# Altium PCB micromouse.PcbDoc
Units mil, origin at the board's own origin, x right, y up, seen from the top; angles counter-clockwise.
Board outline 3606.38 x 4150 mil, 2 copper layers (Top Layer, Bottom Layer), stack 12.8 mil thick; 109 components, 83 nets, 392 pads, 106 vias.
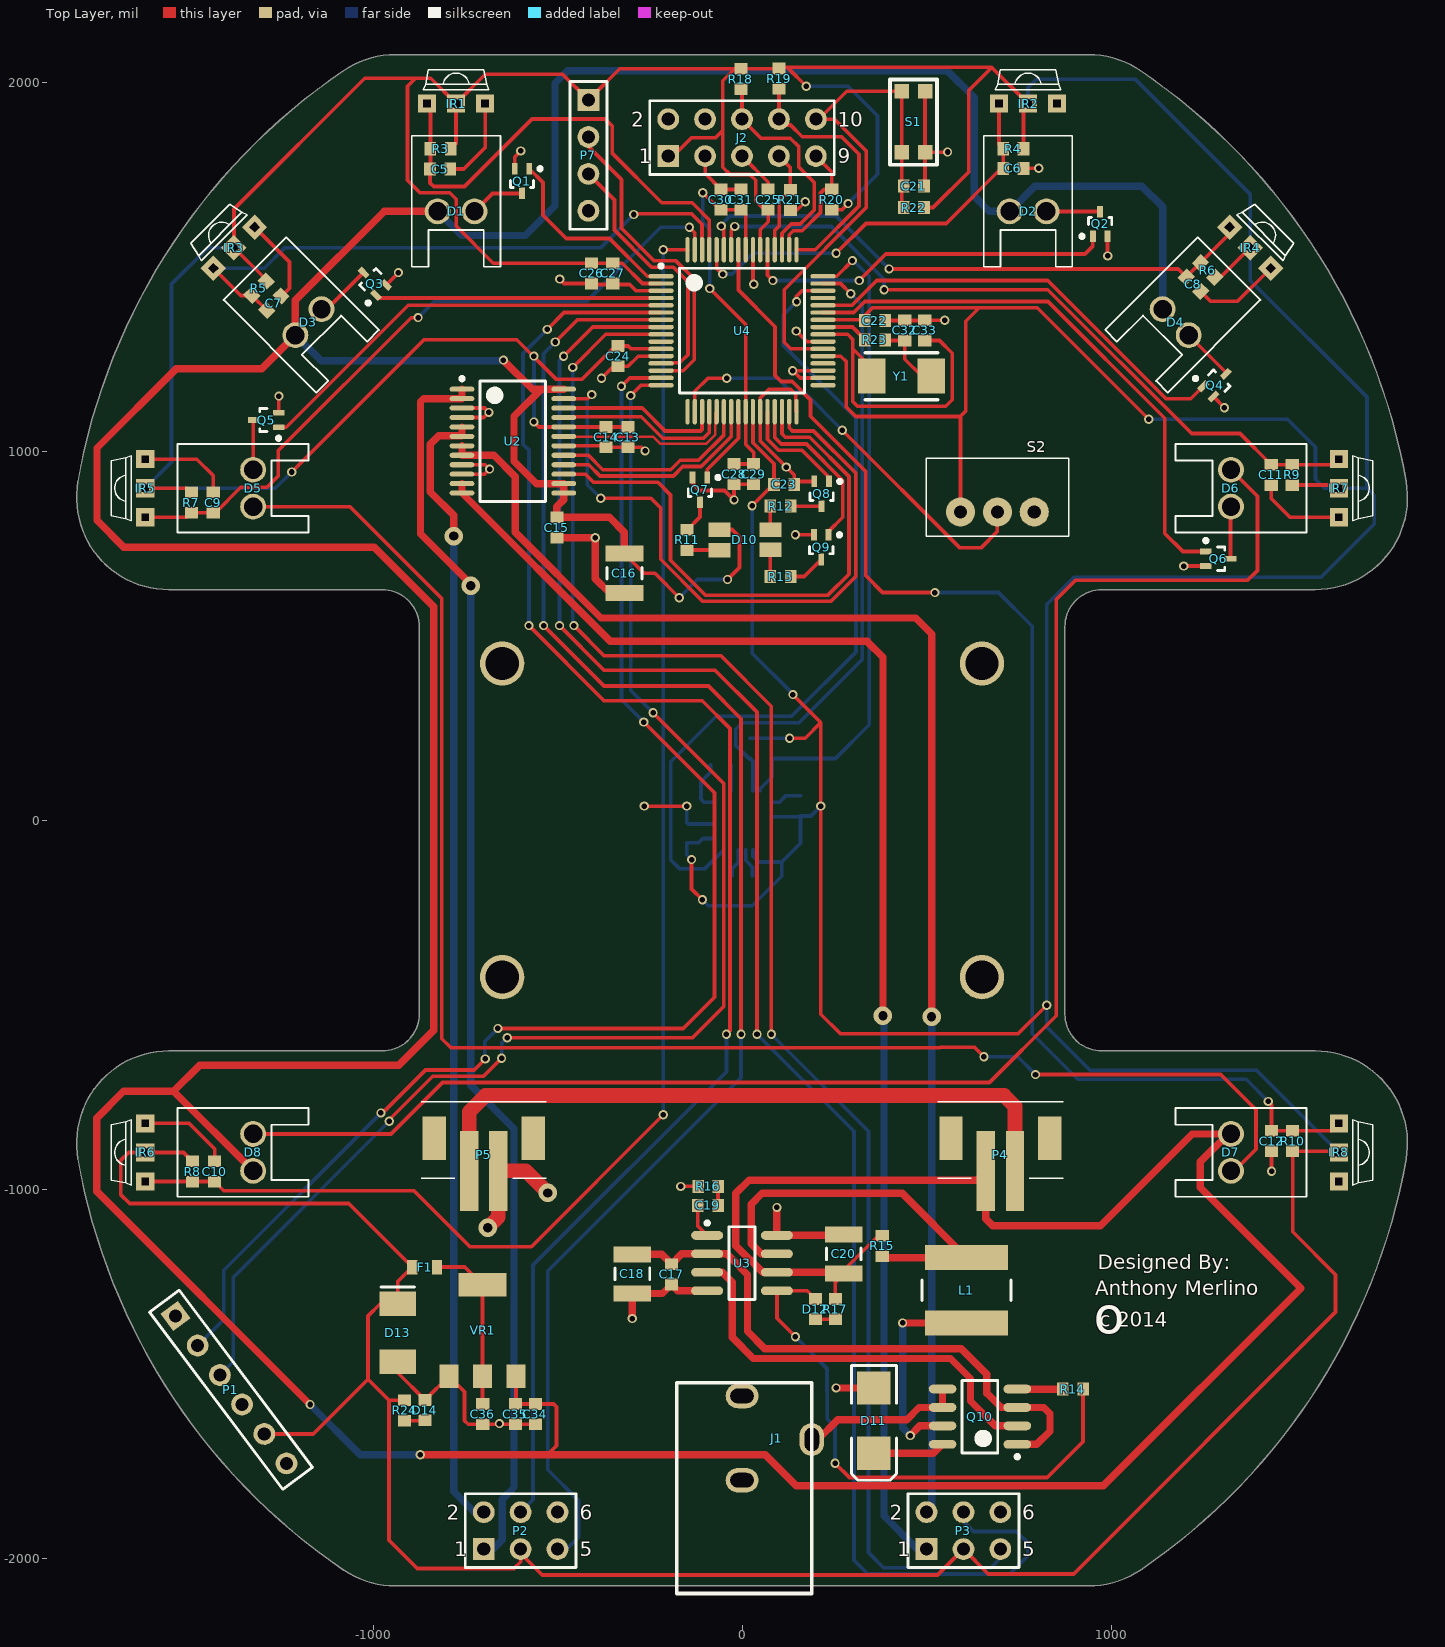
[diagram p0: Top Layer view]
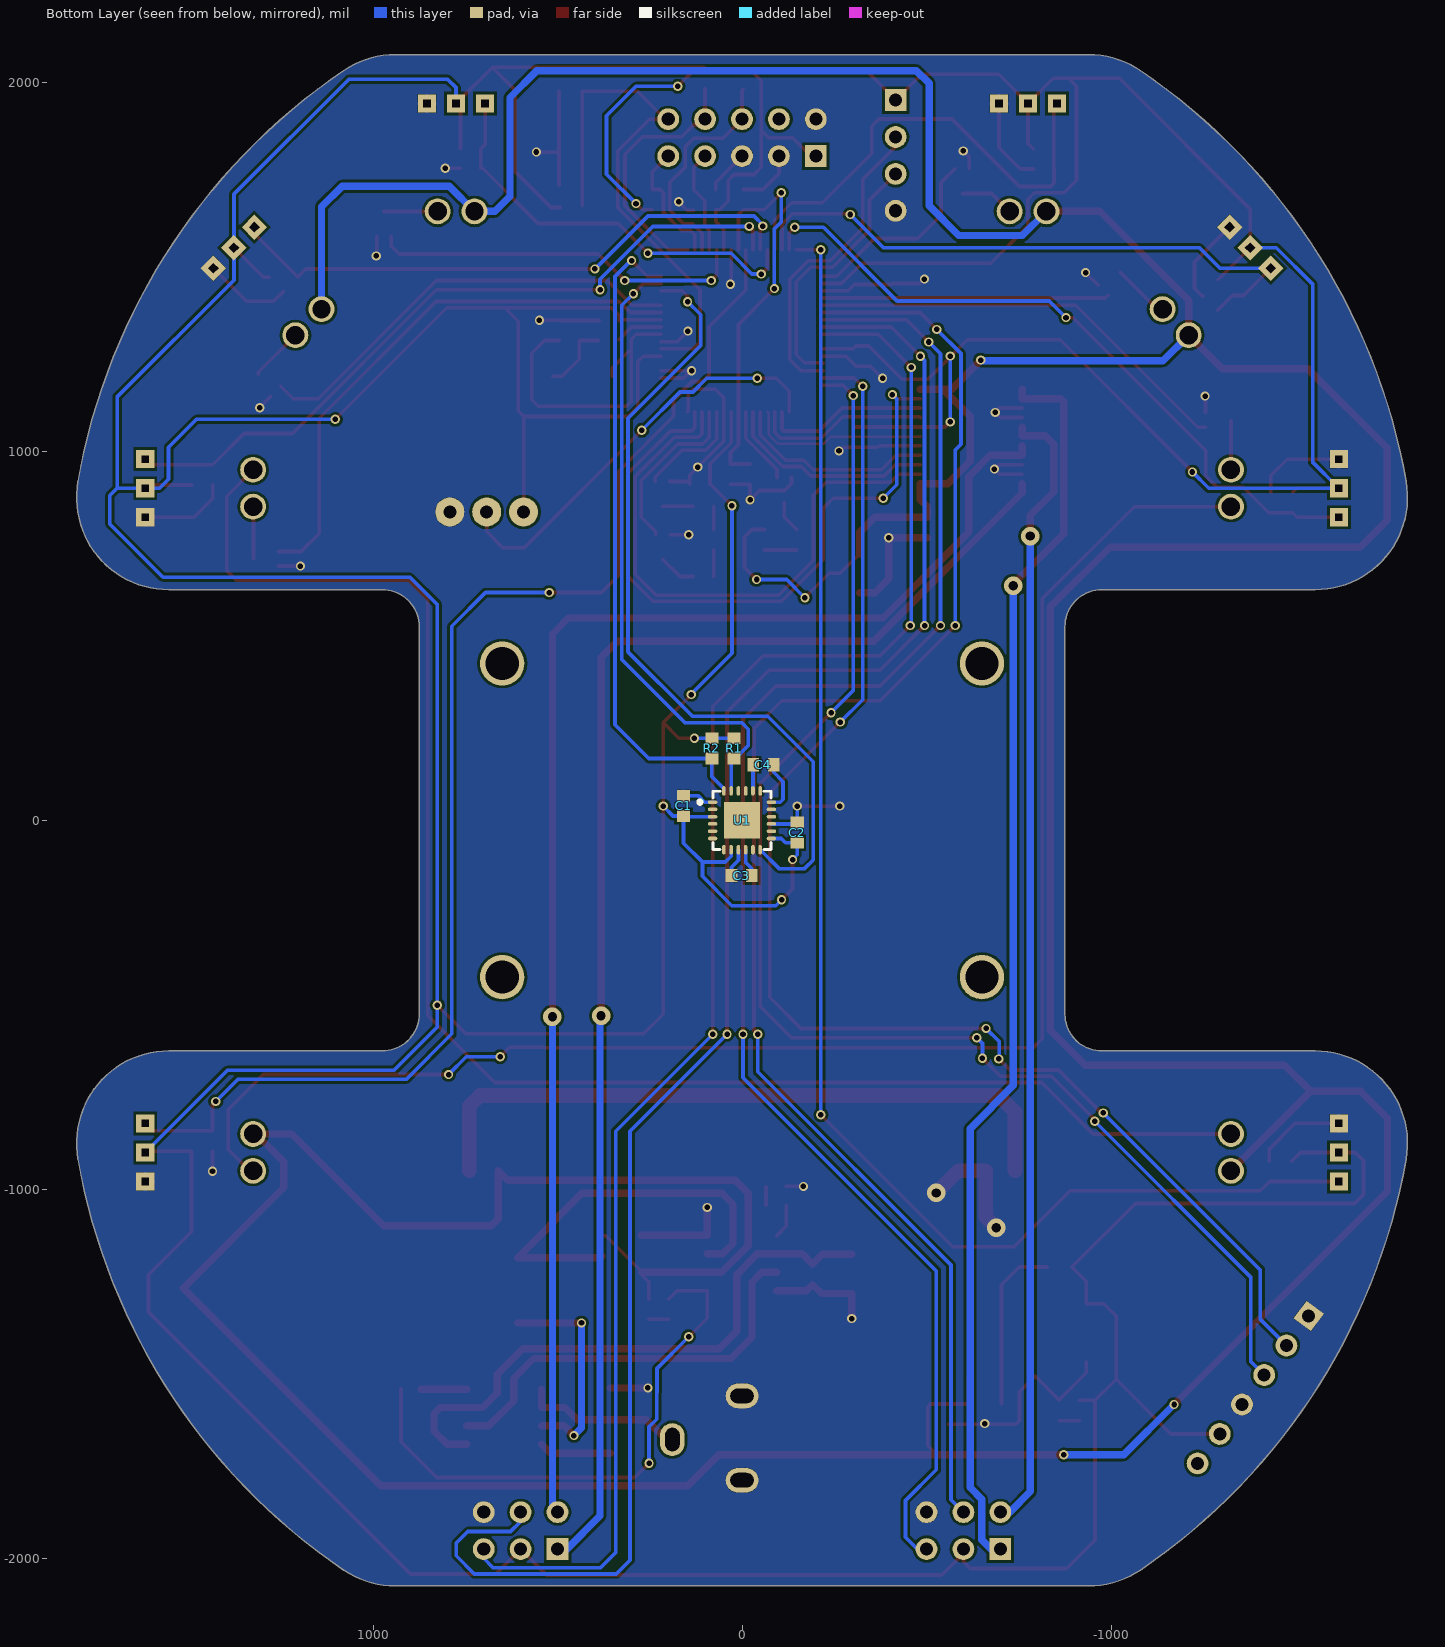
[diagram p1: Bottom Layer view, seen from below]

## Layer stack, top to bottom
Top Solder: solder mask 0.4, Solder Resist, Dk 3.5
Top Layer: signal copper 1.4
Dielectric 1: core 10, FR-4, Dk 4.2
Bottom Layer: signal copper 1.4
Bottom Solder: solder mask 0.4, Solder Resist, Dk 3.5

## Board outline
-1079.28,-2031.91 cw(c-125,-625.01) -1799.55,-918.12 -1799.55,-918.11 cw(c-1553.29,-875.01) -1553.29,-625.01 -975,-625.01 ccw(c-975,-525.01) -875,-525.01 -875,524.99 ccw(c-975,524.99) -975,624.99 -1553.29,624.99 cw(c-1553.29,874.99) -1799.55,918.09 cw(c-125,624.99) -1079.28,2031.89 cw(c-938.95,1824.99) -938.95,2074.99 938.94,2074.99 cw(c938.94,1824.99) 1079.27,2031.89 cw(c125,624.99) 1799.54,918.09 cw(c1553.28,874.99) 1553.28,624.99 975,624.99 ccw(c975,524.99) 875,524.99 875,-525.01 ccw(c975,-525.01) 975,-625.01 1553.28,-625.01 cw(c1553.28,-875.01) 1799.54,-918.11 1799.54,-918.12 cw(c125,-625.01) 1079.27,-2031.91 cw(c938.94,-1825.01) 938.94,-2075.01 -938.95,-2075.01 cw(c-938.95,-1825.01)

## Design rules (kind name [scope] priority, off if disabled: settings)
Clearance [All] p1: gap=7
ComponentClearance [All] p1 off: gap=10 collisioncheckmode=3 verticalgap=10 showdistances=FALSE
MinimumSolderMaskSliver [All] p1 off: minsoldermaskwidth=10
MinimumSolderMaskSliver SilkscreenOverComponentPads [All] p2 off: minsoldermaskwidth=10
PolygonConnect PolygonConnect_1 [isVia] p1: connectstyle=Direct reliefconductorwidth=10 reliefentries=4 polygonreliefangle="90 Angle" airgapwidth=10
RoutingVias [All] p1: holewidth=28 width=50 viastyle="Through Hole" minholewidth=8 minwidth=20 maxholewidth=38 maxwidth=50
SilkToSilkClearance [All] p1 off: silktosilkclearance=10
SilkToSolderMaskClearance [IsPad] p1: minsilkscreentomaskgap=5 clearancetoexposedcopper=TRUE
SolderMaskExpansion [All] p1: expansion=4
Width [All] p1: maxlimit=50 minlimit=7 preferedwidth=8
25 further rules are at their usual default settings.

## Classes and differential pairs
component class Status_LED: D10 Q7 Q8 Q9 R11 R12 R13
component class Power_Regulation: C34 C35 C36 D13 D14 F1 R24 VR1
component class "Motor Control": C13 C14 C15 C16 P2 P3 U2
component class IR_Receivers: C5 C6 C7 C8 C9 C10 C11 C12 IR1 IR2 IR3 IR4 IR5 IR6 IR7 IR8 R3 R4 R5 R6 R7 R8 R9 R10
component class IR_Emitters: D1 D2 D3 D4 D5 D6 D6] D7 D8 Q1 Q2 Q3 Q4 Q5 Q6
component class Gyroscope-Acceleromter: C1 C2 C3 C4 R1 R2 U1
component class controller_power: C21 C22 C23 C24 C25 C26 C27 C28 C29 C30 C31 C32 C33 R22 R23 S1 Y1
component class controller_peripherals: J2 P7 R18 R19 R20 R21 S2 U4
component class Bluetooth: P1
component class battery_charger: C17 C18 C19 C20 D11 D12 J1 L1 P4 P5 Q10 R14 R15 R16 R17 U3

## Components (designator, comment, footprint, x,y, rotation, side; value= is the part's Value field where it differs from the comment)
C1 "Cap Semi" 1608[0603] 158.46,39.37 r270 bottom
C2 "Cap Semi" 1608[0603] -149.61,-33.46 r270 bottom
C3 "Cap Semi" 1608[0603] 0.98,-149.61 r180 bottom
C4 "Cap Semi" 1608[0603] -58.07,150.59 r0 bottom
C5 "Cap Semi" 1608[0603] -817.91,1764.76 r180 top
C6 "Cap Semi" 1608[0603] 735.24,1766.73 r180 top
C7 "Cap Semi" 1608[0603] -1268.7,1401.57 r225 top
C8 "Cap Semi" 1608[0603] 1223.43,1452.76 r135 top
C9 "Cap Semi" 1608[0603] -1433.07,861.22 r270 top
C10 "Cap Semi" 1608[0603] -1429.13,-951.77 r270 top
C11 "Cap Semi" 1608[0603] 1434.06,936.02 r90 top
C12 "Cap Semi" 1608[0603] 1435.04,-869.09 r90 top
C13 "Cap Semi" 1608[0603] -309.06,1038.39 r90 top
C14 "Cap Semi" 1608[0603] -368.11,1038.39 r90 top
C15 "Cap Semi" 1608[0603] -501.97,793.31 r90 top
C16 "Cap Semi" C1210 -318.9,669.29 r90 top
C17 "Cap Semi" 1608[0603] -190.94,-1230.32 r90 top
C18 "Cap Semi" C1210 -297.24,-1229.33 r90 top
C19 "Cap Semi" 1608[0603] -92.52,-1043.31 r180 top
C20 "Cap Semi" C1210 275.59,-1175.2 r270 top
C21 "Cap Semi" 1608[0603] 465.55,1718.5 r180 top
C22 "Cap Semi" 1608[0603] 360.24,1354.33 r180 top
C23 "Cap Semi" 1608[0603] 114.17,910.43 r180 top
C24 "Cap Semi" 1608[0603] -335.63,1257.87 r90 top
C25 "Cap Semi" 1608[0603] 70.87,1682.09 r270 top
C26 "Cap Semi" 1608[0603] -407.48,1482.28 r90 top
C27 "Cap Semi" 1608[0603] -350.39,1482.28 r90 top
C28 "Cap Semi" 1608[0603] -21.65,937.99 r90 top
C29 "Cap Semi" 1608[0603] 31.5,937.99 r90 top
C30 "Cap Semi" 1608[0603] -57.09,1682.09 r270 top
C31 "Cap Semi" 1608[0603] -2.95,1682.09 r270 top
C32 "Cap Semi" 1608[0603] 440.94,1327.76 r270 top
C33 "Cap Semi" 1608[0603] 495.08,1327.76 r270 top
C34 "Cap Semi" 1608[0603] -560.04,-1609.25 r90 top
C35 "Cap Semi" 1608[0603] -614.17,-1609.25 r90 top
C36 "Cap Semi" 1608[0603] -702.76,-1609.25 r90 top
D1 "LED" LED-BENT -775,1650 r180 top
D2 "LED" LED-BENT 775,1650 r180 top
D3 "LED" LED-BENT -1175,1350 r225 top
D4 "LED" LED-BENT 1175,1350 r135 top
D5 "LED" LED-BENT -1325,900 r270 top
D6 "LED" LED-BENT 1325,900 r90 top
D7 "LED" LED-BENT 1325,-900 r90 top
D8 "LED" LED-BENT -1325,-900 r270 top
D10 "LED_RGB_CC" SM1210RGB 7.87,760.43 r90 top
D11 "D Schottky" SMB 357.28,-1626.97 r270 top
D12 "LED" 0603 198.82,-1324.8 r90 top
D13 "3.9V" DO-214AC -933.07,-1388.78 r270 top
D14 "LED" 0603 -859.25,-1598.43 r90 top
F1 "500mA" "0603 PTC Fuse" -860.24,-1210.63 r180 top
IR1 "TSL262R" TSL262R -775,1975 r180 top
IR2 "TSL262R" TSL262R 775,1975 r180 top
IR3 "TSL262R" TSL262R -1400,1575 r225 top
IR4 "TSL262R" TSL262R 1400,1575 r135 top
IR5 "TSL262R" TSL262R -1650,900 r270 top
IR6 "TSL262R" TSL262R -1650,-900 r270 top
IR7 "TSL262R" TSL262R 1650,900 r90 top
IR8 "TSL262R" TSL262R 1650,-900 r90 top
J1 "DC Barrel Jack" "DC BARREL JACK" 0,-1560 r90 top
J2 "JTAG" HDR2X5 -200,1800 r0 top
L1 "Inductor" INDC6060X49N 608.27,-1273.62 r90 top
P1 "BLUETOOTH MODULE" HDR1X6 -1535.43,-1343.5 r307 top
P2 "LEFT MOTOR" HDR2X3 -700,-1975 r0 top
P3 "RIGHT MOTOR" HDR2X3 500,-1975 r0 top
P4 "JST 2-Pin" "JST CONNECTOR 2-PIN" 700,-950 r0 top
P5 "JST 2-Pin" "JST CONNECTOR 2-PIN" -700,-950 r0 top
P7 "UART_DEBUG" HDR1X4 -416.34,1951.77 r270 top
Q1 "Pre-Biased NPN" SOT-416 -596.46,1732.28 r270 top
Q2 "Pre-Biased NPN" SOT-416 970.47,1616.14 r90 top
Q3 "Pre-Biased NPN" SOT-416 -1001.97,1460.63 r135 top
Q4 "Pre-Biased NPN" SOT-416 1287.4,1186.02 r45 top
Q5 "Pre-Biased NPN" SOT-416 -1289.37,1084.65 r180 top
Q6 "Pre-Biased NPN" SOT-416 1290.35,708.66 r0 top
Q7 "Pre-Biased NPN" SOT-416 -114.17,895.67 r270 top
Q8 "Pre-Biased NPN" SOT-416 215.55,884.84 r270 top
Q9 "Pre-Biased NPN" SOT-416 214.57,740.16 r270 top
Q10 "Dual P-Channel" SOIC-8 644.69,-1616.14 r180 top
R1 "Resistor" 0603 21.65,194.88 r90 bottom
R2 "Resistor" 0603 81.69,194.88 r90 bottom
R3 "Resistor" 0603 -816.93,1819.88 r180 top
R4 "Resistor" 0603 735.24,1819.88 r180 top
R5 "Resistor" 0603 -1309.06,1441.93 r225 top
R6 "Resistor" 0603 1261.81,1491.14 r135 top
R7 "Resistor" 0603 -1492.13,861.22 r270 top
R8 "Resistor" 0603 -1489.17,-951.77 r270 top
R9 "Resistor" 0603 1491.14,936.02 r90 top
R10 "Resistor" 0603 1492.13,-869.09 r90 top
R11 "Resistor" 0603 -148.62,759.84 r270 top
R12 "Resistor" 0603 104.33,851.38 r180 top
R13 "Resistor" 0603 104.33,660.43 r180 top
R14 "Resistor" 0603 896.65,-1541.34 r180 top
R15 "Resistor" 0603 379.92,-1153.54 r270 top
R16 "Resistor" 0603 -91.54,-992.13 r0 top
R17 "Resistor" 0603 252.95,-1324.8 r270 top
R18 "Resistor" 0603 -2.95,2008.86 r90 top
R19 "Resistor" 0603 100.39,2009.84 r90 top
R20 "Resistor" 0603 243.11,1682.09 r270 top
R21 "Resistor" 0603 130.91,1681.1 r90 top
R22 "Resistor" 0603 465.55,1660.43 r0 top
R23 "Resistor" 0603 360.24,1302.17 r180 top
R24 "Resistor" 0603 -914.37,-1599.41 r90 top
S1 "KMR4" KMR4 464.57,1892.72 r270 top
S2 "SW-SPDT" "SPDT Switch" 691.93,875 r270 top
U1 "MPU-9150" MPU-9150 0,0 r180 bottom
U2 "TB6612FNG" SSOP24-P-300-0.65A -621.06,1027.56 r0 top
U3 "LTC4002ES8-8.4" LT-S8-8_N 0,-1200 r0 top
U4 "TM4C123GH6PM" TSQFP50P1200X1200X145-64N 0,1326.77 r0 top
VR1 "AP1117" SOT-223 -703.17,-1416.07 r0 top
Y1 "XTAL" ABM3_SERIES 432.09,1203.74 r180 top

## Footprints (in the part's own frame and the unit in brackets; to place one, negate y for a bottom-side part, rotate by r counter-clockwise, add the part's x,y. Pads: shape width x height; smd on the part's side, far side on the other; paste and mask are expansions set on the pad)
0603 [mm] "Chip Capacitor; Body 1.6 x 0.8 mm (LxW typ)"
  rect 0.8x0.9 smd: 1(-0.7,0) 2(0.7,0)
  body extent -0.87,-0.48 0.87,0.48, height 1.3
"0603 PTC Fuse" [mm] "0603 1mm x 0.7mm Pads with 1mm Spacing"
  rect 0.7x1 smd: 1(-0.85,0) 2(0.85,0)
1608[0603] [mm] "Chip Capacitor, Body 1.6x0.8mm, IPC High Density"
  rect 0.8x0.9 smd: 1(-0.7,0) 2(0.7,0)
  body extent -0.87,-0.48 0.87,0.48, height 1.3
ABM3_SERIES [mm] "2-SMD"
  rect 1.9x2.4 smd: 1(-2.05,0) 2(2.05,0)
  silkscreen extent -2.5,-1.6 2.5,1.63
C1210 [mm] "Chip Capacitor, Body 3.2x2.5mm, IPC High Density"
  rect 1.1x2.6 smd: 1(-1.35,0) 2(1.35,0)
  silkscreen extent -0.4,-1.2 0.4,1.2, body extent -1.7,-1.35 1.7,1.35, height 1.3
"DC BARREL JACK" [mm] "Sparkfun: PRT-10811"
  oval 1.7x2.25 hole 1 slot 1.6 at 90 deg: 1(0,0) 2(-5.8,0)
  oval 2.25x1.7 hole 1 slot 1.6 at 0 deg: 3(-3,-4.8)
  silkscreen extent -13.6,-4.8 0.9,4.5
DO-214AC [mm] "Molded Diode, 2-Leads, Body 4.3x2.6mm, IPC Medium Density"
  rect 1.7x2.5 smd: 1(-2,0) 2(2,0)
  silkscreen extent -3.15,-1.15 -3.15,1.15, body extent -2.6,-1.27 2.6,1.33, height 2.4
HDR1X4 [mm] "Connector; Header; 4 Position"
  rect 1.5x1.5 hole 0.9: 1(0,0)
  round 1.5 hole 0.9: 2(2.54,0) 3(5.08,0) 4(7.62,0)
  silkscreen extent -1.27,-1.27 8.89,1.27
HDR1X6 [mm] "Connector; Header; 6 Position"
  rect 1.5x1.5 hole 0.9: 1(0,0)
  round 1.5 hole 0.9: 2(2.54,0) 3(5.08,0) 4(7.62,0) 5(10.16,0) 6(12.7,0)
  silkscreen extent -1.27,-1.27 13.97,1.27
HDR2X3 [mm] "Connector; Header; 3x2 Position"
  rect 1.5x1.5 hole 0.9: 1(0,0)
  round 1.5 hole 0.9: 2(0,2.54) 3(2.54,0) 4(2.54,2.54) 5(5.08,0) 6(5.08,2.54)
  silkscreen extent -1.27,-1.27 6.35,3.81
HDR2X5 [mm] "Connector; Header; 5x2 Position"
  rect 1.5x1.5 hole 0.9: 1(0,0)
  round 1.5 hole 0.9: 2(0,2.54) 3(2.54,0) 4(2.54,2.54) 5(5.08,0) 6(5.08,2.54) 7(7.62,0) 8(7.62,2.54) 9(10.16,0) 10(10.16,2.54)
  silkscreen extent -1.27,-1.27 11.43,3.81
INDC6060X49N [mm] "Chip Inductor, 2-Leads, Body 6.00x6.00mm, IPC Medium Density"
  rect 1.7x5.7 smd: 1(-2.25,0) 2(2.25,0)
  silkscreen extent -0.7,-3.05 0.7,3.05, body extent -3.15,-3.15 3.15,3.15, height 4.9
"JST CONNECTOR 2-PIN" [mm] "2-Pin JST connector for battery"
  rect 1.25x5.5 smd: 1(-1,0) 2(1,0)
  rect 1.6x3 smd: N(-3.4,2.25) N(3.4,2.25)
  silkscreen extent -4.32,-0.51 4.32,4.75
KMR4 [mm]
  rect 1x1 smd: 1(2.1,0.8) 2(2.1,-0.8) 3(-2.1,0.8) 4(-2.1,-0.8)
  silkscreen extent -2.91,-1.61 2.94,1.63
LED-BENT [mil] "LED; 2 Leads"
  round 70 hole 50: 1(50,0) 2(-50,0)
  silkscreen extent -120,-205 120,150
LT-S8-8_N [mm] "SOIC, 8-Leads, Body 5x4mm, Pitch 1.27mm, IPC Medium Density"
  oval 2.2x0.6 smd: 1(-2.4,1.905) 2(-2.4,0.635) 3(-2.4,-0.635) 4(-2.4,-1.905) 5(2.4,-1.905) 6(2.4,-0.635) 7(2.4,0.635) 8(2.4,1.905)
  silkscreen extent -2.52,-2.5 0.9,2.88, body extent -2,-2.5 2,2.5, height 1.76
MPU-9150 [mm] "QFN, 24-Leads, Body 4.0x4.0mm (max), Pitch 0.50mm, IPC Medium Density"
  oval 0.65x0.25 smd: 1(-2.025,1.25) 2(-2.025,0.75) 3(-2.025,0.25) 4(-2.025,-0.25) 5(-2.025,-0.75) 6(-2.025,-1.25) 13(2.025,-1.25) 14(2.025,-0.75) 15(2.025,-0.25) 16(2.025,0.25) 17(2.025,0.75) 18(2.025,1.25)
  oval 0.25x0.65 smd: 7(-1.25,-2.025) 8(-0.75,-2.025) 9(-0.25,-2.025) 10(0.25,-2.025) 11(0.75,-2.025) 12(1.25,-2.025) 19(1.25,2.025) 20(0.75,2.025) 21(0.25,2.025) 22(-0.25,2.025) 23(-0.75,2.025) 24(-1.25,2.025)
  rect 2.5x2.5 smd: 25(0,0)
  silkscreen extent -3.03,-2 2,2, body extent -2,-2 2,2, height 0.95
SM1210RGB [mm] "BIVAR RGB LED, 1210"
  rect 1x1.5 smd: 1(0.7,1.75) 2(-0.711,1.753) 3(0.7,-1.75) 4(-0.7,-1.75)
SMB [mm] "DO-214-AA/SMB; 2 C-Bend Leads; Body 5.3 x 3.6 mm, inc. leads (LxW)"
  rect 2.3x2.3 smd: 1(-2.25,0) 2(2.25,0)
  silkscreen extent -3.8,-1.55 4.1,1.55
SOIC-8 [mm] "SOIC, 8-Leads, Body 4.90x3.90mm, Pitch 1.27mm, IPC Medium Density"
  oval 1.9x0.6 smd: 1(-2.575,1.905) 2(-2.575,0.635) 3(-2.575,-0.635) 4(-2.575,-1.905) 5(2.575,-1.905) 6(2.575,-0.635) 7(2.575,0.635) 8(2.575,1.905)
  silkscreen extent -2.7,-2.5 1.22,2.88, body extent -2,-2.5 2,2.5, height 1.75
SOT-223 [mm]
  rect 1.3x1.6 smd: 1(-2.3,-2.3) 2(0,-2.3) 3(2.3,-2.3)
  rect 3.3x1.6 smd: 4(0,4)
SOT-416 [mm] "SOT23, 3-Leads, Body 1.6x1.7mm (max), Pitch 0.50mm, IPC Medium Density"
  rect 0.8x0.4 smd: 1(-0.85,0.5) 2(-0.85,-0.5) 3(0.85,0)
  silkscreen extent -0.97,-0.8 0.45,1.38, body extent -0.45,-0.83 0.45,0.82, height 0.9
"SPDT Switch" [mm]
  round 2 hole 0.9: 1(1,2.54) 2(1,0) 3(1,-2.54)
  silkscreen extent -2.69,-4.9 2.69,4.9, body extent -2.69,-4.9 2.69,4.9, height 11.6
SSOP24-P-300-0.65A [mm] "TSOP, 24-Leads, Body 8.3x5.6mm (max), Pitch 0.65mm, IPC Medium Density"
  oval 1.7x0.35 smd: 1(-3.5,3.575) 2(-3.5,2.925) 3(-3.5,2.275) 4(-3.5,1.625) 5(-3.5,0.975) 6(-3.5,0.325) 7(-3.5,-0.325) 8(-3.5,-0.975) 9(-3.5,-1.625) 10(-3.5,-2.275) 11(-3.5,-2.925) 12(-3.5,-3.575) 13(3.5,-3.575) 14(3.5,-2.925) 15(3.5,-2.275) 16(3.5,-1.625) 17(3.5,-0.975) 18(3.5,-0.325) 19(3.5,0.325) 20(3.5,0.975) 21(3.5,1.625) 22(3.5,2.275) 23(3.5,2.925) 24(3.5,3.575)
  silkscreen extent -3.62,-4.15 2.25,4.42, body extent -2.8,-4.15 2.8,4.15, height 1.6
TSL262R [mm] "IR Receiver"
  rect 1.25x1.25 hole 0.5 square: 0(-2,0.83) 1(0,0.83) 2(2,0.83)
  silkscreen extent -2.25,-1.5 2.25,-0.13
TSQFP50P1200X1200X145-64N [mm] "TSQFP, 64-Leads, Body 10.00x10.00mm, Pitch 0.50mm, IPC Medium Density"
  oval 1.75x0.3 smd: 1(-5.575,3.75) 2(-5.575,3.25) 3(-5.575,2.75) 4(-5.575,2.25) 5(-5.575,1.75) 6(-5.575,1.25) 7(-5.575,0.75) 8(-5.575,0.25) 9(-5.575,-0.25) 10(-5.575,-0.75) 11(-5.575,-1.25) 12(-5.575,-1.75) 13(-5.575,-2.25) 14(-5.575,-2.75) 15(-5.575,-3.25) 16(-5.575,-3.75) 33(5.575,-3.75) 34(5.575,-3.25) 35(5.575,-2.75) 36(5.575,-2.25) 37(5.575,-1.75) 38(5.575,-1.25) 39(5.575,-0.75) 40(5.575,-0.25) 41(5.575,0.25) 42(5.575,0.75) 43(5.575,1.25) 44(5.575,1.75) 45(5.575,2.25) 46(5.575,2.75) 47(5.575,3.25) 48(5.575,3.75)
  oval 0.3x1.75 smd: 17(-3.75,-5.575) 18(-3.25,-5.575) 19(-2.75,-5.575) 20(-2.25,-5.575) 21(-1.75,-5.575) 22(-1.25,-5.575) 23(-0.75,-5.575) 24(-0.25,-5.575) 25(0.25,-5.575) 26(0.75,-5.575) 27(1.25,-5.575) 28(1.75,-5.575) 29(2.25,-5.575) 30(2.75,-5.575) 31(3.25,-5.575) 32(3.75,-5.575) 49(3.75,5.575) 50(3.25,5.575) 51(2.75,5.575) 52(2.25,5.575) 53(1.75,5.575) 54(1.25,5.575) 55(0.75,5.575) 56(0.25,5.575) 57(-0.25,5.575) 58(-0.75,5.575) 59(-1.25,5.575) 60(-1.75,5.575) 61(-2.25,5.575) 62(-2.75,5.575) 63(-3.25,5.575) 64(-3.75,5.575)
  silkscreen extent -5.7,-4.3 4.3,4.57, body extent -5,-5 5,5, height 1.45

## Part data
C1 C2 C3 C4 C5 C6 C7 C8 C9 C10 C11 C12 C13 C14 C15 C16 C17 C18 C19 C20 C21 C22 C23 C24 C25 C26 C27 C28 C29 C30 C31 C32 C33 C34 C35 C36: "Capacitor (Semiconductor SIM Model)"
D10: "RGB LED Common Cathode"
D11: "Schottky Diode"
D13: library part "Zener Diode", "3.9V 1.25W"
F1: library part Fuse, "Fuse"
J1: "DC Barrel Jack, Fits 5mm DC Wall Adapter"
J2: library part "10-Pin JTAG ARM", "10-Pin JTAG Connector for Cortex M4 etc."
P1: library part "Header 6", "Header, 6-Pin"
P2 P3: library part "Header 3X2", "Header, 3-Pin, Dual row"
P4 P5: library part "JST Connector 2-Pin", "Header, 2-Pin"
P7: library part "Header 4", "Header, 4-Pin"
Q10: library part Si9933ADY, "Dual P-Channel 20-V (D-S) MOSFET"
S1: library part "SPST Tactile Switch", "Switch"
S2: "SPDT Subminiature Toggle Switch, Right Angle Mounting, Vertical Actuation"
U3: "Standalone Li-Ion Switch Mode Battery Charger, 8.9 to 22 V Vin, 8-pin SOIC (S8-8), -40 to 85 degC"
U4: "Tiva C TM4C123GH6PM"
Y1: "Crystal Oscillator"

## Free pads (board coordinates)
  round 120 hole 90: ""(-650,-425) ""(-650,425) ""(650,-425) ""(650,425)

## Via types
v1: diameter 25, hole 15, Top Layer to Bottom Layer, 100 vias
v2: diameter 50, hole 25, Top Layer to Bottom Layer, 6 vias

## Nets (pads, with @x,y where several pads share a name; then routed paths per layer and width w, separated by ;. In a path a pad name is that pad's centre, name@x,y a point inside that pad or via, vN(x,y) a via of type N, cw(c..) or ccw(c..) an arc to the next point about the centre after c; other vN are vias at no path point)
3.3V: C1.2 C2.2 C13.2 C14.2 C22.2 C23.2 C24.2 C25.2 C26.2 C27.2 D13.1 F1.2 IR1.1 IR2.1 IR3.1 IR4.1 IR5.1 IR6.1 IR7.1 IR8.1 J2.1 P1.5 P2.3 P3.3 P7.1 R1.2 R2.2 R3.1 R4.1 R5.1 R6.1 R7.1 R8.1 R9.1 R10.1 R18.2 R19.2 R20.2 R22.2 R24.2 S2.3 U1.3 U1.8 U1.13 U2.20 U4.2 U4.11 U4.26 U4.37 U4.42 U4.54 | length 26493.6
  Top Layer w10: IR5.1 -1503.35,900 R7.1 ; R8.1 -1513.38,-900 IR6.1 -1661.81,-900 -1684.06,-922.24 -1684.06,-1013.78 -1659.45,-1038.39 -1065.95,-1038.39 F1.2 -933.07,-1250 D13.1 -980.31,-1310.04 -1013.78,-1343.5 -1013.78,-1514.76 ; P1.5 -1161.97,-1662.96 -1013.78,-1514.76 ; R5.1@-1289.57,1464.57 IR3.1 -1376.89,1656.57 -1022.64,2010.83 -884.84,2010.83 ; v1(-1220.47,943.9) -862.2,1302.17 -610.24,1302.17 -502.95,1194.88 -434.06,1194.88 -343.5,1285.43 C24.2 -309.05,1285.43 -301.18,1277.56 U4.11 ; R24.2 -956.69,-1571.85 ; R3.1 -775,1834.25 IR1.1 ; P2.3@-600,-2000 -600,-2009.45 -618.11,-2027.56 -879.92,-2027.56 -956.69,-1950.79 -956.69,-1571.85 ; P2.3 -600,-1986.61 -541.34,-2045.28 529.72,-2045.28 P3.3 667.32,-2042.32 898.62,-2042.32 1608.27,-1332.68 1608.27,-1231.3 1492.13,-1115.16 R10.1 1613.98,-896.65 IR8.1 ; v1(-563.98,1079.72) -550.2,1065.95 U2.20 C14.2 C13.2 ; U4.2 -269.69,1454.73 -324.8,1509.84 C27.2 C26.2 -674.21,1509.84 -774.61,1610.24 -774.61,1683.07 -792.06,1700.52 -872.76,1700.52 -906.5,1734.25 -906.5,1989.17 -884.84,2010.83 ; J2.1 -186.22,1800 -136.81,1849.41 -71.85,1849.41 -52.17,1869.09 ; v1(-136.81,-106.3) -136.81,-186.02 v1(-107.28,-215.55) ; v1(27.32,852.12) 27.32,852.36 85.39,910.43 C23.2 86.61,965.97 29.53,1023.06 U4.26 ; U4.54 49.21,1600.39 70.87,1622.05 C25.2 61.02,1654.53 37.4,1678.15 37.4,1734.25 21.65,1750 -32.48,1750 -52.17,1769.69 -52.17,1869.09 ; R19.2@99.41,2036.42 R18.2 R18.2@-19.68,2036.42 ; R19.2 103.35,2040.35 676.97,2040.35 ; 125.98,2037.4 v1(174.21,1989.17) ; v1(128.94,222.44) 171.26,222.44 213.58,264.76 ; v1(137.8,340.55) 213.58,264.76 ; U4.37 267.72,1257.87 282.48,1243.11 282.48,1120.08 308.07,1094.49 591.54,1094.49 606.3,1109.25 606.3,1352.36 638.78,1384.84 ; U4.42 C22.2@330.71,1356.3 ; R20.2 270.67,1654.53 v1(287.4,1671.26) ; C22.2 332.68,1367.84 353.61,1388.78 800.2,1388.78 v1(1102.36,1086.61) ; R22.2 517.72,1660.43 614.17,1756.89 614.17,1977.56 676.97,2040.35 ; S2.3 591.93,1094.09 ; R4.1 762.8,1930.12 IR2.1 676.97,2040.35 ; v1(825.79,-500.98) 748.03,-578.74 266.73,-578.74 213.58,-525.59 v1(213.58,38.39) 213.58,264.76 ; R6.1 1296.66,1471.66 IR4.1 ; R9.1 1608.86,908.47 IR7.1 ; -1013.78,-1514.76 -956.69,-1571.85 ; -884.84,2010.83 -843.5,2010.83 IR1.1 ; IR1.1 -695.67,2021.65 -486.22,2021.65 P7.1 -331.69,2036.42 R18.2@-19.68,2036.42 ; -52.17,1869.09 -52.17,2003.94 R18.2@-19.68,2036.42
  Bottom Layer w10: IR3.1 -1447.56,1551.89 -1546.26,1453.2 -1546.26,971.06 IR5.1 -1616.93,899.61 -1264.76,899.61 v1(-1220.47,943.9) ; v1(-563.98,1079.72) v1(-563.98,1257.87) ; v1(-136.81,-106.3) -149.61,-93.5 C2.2 -118.11,-61.02 -106.3,-49.21 U1.13 ; v1(-107.28,-215.55) -91.54,-231.3 27.56,-231.3 107.28,-151.57 107.28,-113.19 ; R1.2 R2.2 v1(128.94,222.44) ; v1(27.32,852.12) 27.32,452.99 137.8,342.52 v1(137.8,340.55) ; U1.8 29.53,-97.44 45.28,-113.19 107.28,-113.19 ; U1.3 C1.2@156.5,9.84 ; v1(174.21,1989.17) 287.4,1989.17 367.13,1909.45 367.13,1750.98 v1(287.4,1671.26) ; v1(213.58,38.39) 187.01,11.81 C1.2 158.46,-62.01 107.28,-113.19 ; IR2.1 775,1985.63 797.24,2007.87 1065.94,2007.87 1376.89,1696.93 IR4.1 1376.89,1463.66 1693.5,1147.05 1693.5,900 ; v1(1102.36,1086.61) 1478.35,1086.61 1554.13,1010.83 1554.13,924.21 1578.35,900 IR7.1 1693.5,900 ; IR8.1 1394.49,-677.17 942.91,-677.17 825.79,-560.04 v1(825.79,-500.98) 825.79,584.65 899.61,658.46 1568.9,658.46 1713.58,803.15 1713.58,879.92 1693.5,900
BLUETOOTH_CTS: P1.6
BLUETOOTH_RX: P1.2 U4.15 | length 3774.3
  Top Layer w10: v1(-978.59,-793.07) -978.35,-793.31 -974.41,-793.31 -857.73,-676.63 -725.84,-676.63 v1(-695.87,-646.65) ; v1(-661.42,-563.98) -159.45,-563.98 -74.8,-479.33 -74.8,74.52 v1(-266.38,266.1) ; v1(-326.91,1176.32) -304.41,1198.82 U4.15
  Bottom Layer w10: P1.2 -1404.69,-1352.8 -1404.69,-1219.17 v1(-978.59,-793.07) ; v1@-697.11,-645.41 -697.11,-599.67 v1(-661.42,-563.98) ; v1(-326.91,1176.32) -326.91,326.63 v1(-266.38,266.1)
BLUETOOTH_TX: P1.3 U4.16 | length 3793.2
  Top Layer w10: v1(-955.96,-815.69) -956.2,-815.45 -956.2,-811.52 -838.31,-693.63 -700.52,-693.63 v1(-651.57,-644.68) ; v1(-636.18,-589.22) -134.21,-589.22 -49.48,-504.49 -49.48,99.68 v1(-241.14,291.34) ; v1(-301.67,1151.08) -273.62,1179.13 U4.16
  Bottom Layer w10: P1.3 -1378.94,-1467.1 -1378.94,-1238.67 v1(-955.96,-815.69) ; v1(-651.57,-644.68) -651.57,-604.61 v1(-636.18,-589.22) ; v1(-301.67,1151.08) -301.67,351.87 v1(-241.14,291.34)
DEBUG_RX: P7.3 U4.13 | length 718.9
  Top Layer w10: P7.3 -345.47,1680.91 -345.47,1599.41 -245.08,1499.02 -186.02,1499.02 -146.65,1459.65 -146.65,1261.81 -168.5,1239.97 -217.71,1239.97 U4.13
DEBUG_TX: P7.2 U4.14 | length 859
  Top Layer w10: P7.2 -416.34,1825.79 -326.77,1736.22 -326.77,1604.75 -238.04,1516.02 -178.98,1516.02 -129.65,1466.69 -129.65,1248.3 -159.45,1218.5 U4.14
GND: C1.1 C2.1 C3.1 C4.1 C5.1 C6.1 C7.1 C8.1 C9.1 C10.1 C11.1 C12.1 C13.1 C14.1 C15.1 C16.1 C17.1 C18.1 C20.1 C21.1 C22.1 C23.1 C24.1 C25.1 C26.1 C27.1 C28.1 C29.1 C30.1 C31.1 C32.1 C33.1 C34.1 C35.1 C36.1 D11.1 D13.2 D14.2 IR1.0 IR2.0 IR3.0 IR4.0 IR5.0 IR6.0 IR7.0 IR8.0 J1.1 J1.2 J2.2 J2.3 J2.5 P1.1 P1.4 P2.6 P3.6 P5.2 P7.4 Q1.2 Q2.2 Q3.2 Q4.2 Q5.2 Q6.2 Q7.2 Q8.2 Q9.2 R16.1 R21.1 S1.1 S1.3 S2.1 U1.1 U1.9 U1.11 U1.15 U1.17 U1.18 U2.3 U2.4 U2.9 U2.10 U2.18 U3.4 U3.8 U4.3 U4.12 U4.27 U4.32 U4.34 U4.35 U4.39 U4.55 VR1.1 | length 7250.8
  Top Layer w10: IR6.0 -1498.62,-821.26 -1429.13,-890.75 C10.1 ; IR5.0 -1477.76,978.74 -1433.07,934.05 C9.1 ; IR3.0 -1226.38,1512.73 -1226.38,1441.93 -1247.25,1421.06 C7.1 ; Q5.2 -1255.91,1148.62 v1(-1254.92,1149.61) ; Q3.2 v1(-931.1,1484.25) v1(-931.1,1484.25) ; D13.2 -933.07,-1497.05 D14.2 -795,-1506.62 VR1.1 -751.97,-1548.37 -751.97,-1626.97 -742.13,-1636.81 C36.1 C35.1 C34.1 ; C5.1 -753.94,1764.76 -696.26,1822.44 IR1.0 ; U2.10 -697.84,937.99 v1(-684.06,951.77) -695.87,963.58 U2.9 ; U2.4 -699.8,1091.54 v1(-686.02,1105.31) -697.83,1117.13 U2.3 ; Q1.2 -616.14,1797.24 v1(-599.41,1813.98) ; P2.6 P2.6@-500,-1850.39 ; v1(-494.09,1466.54) -482.29,1454.73 C26.1 ; U2.18 -372.05,1014.76 C14.1 C13.1 -272.64,1010.83 v1(-262.8,1000.98) ; C26.1@-404.53,1451.77 -304.13,1451.77 -287.4,1435.04 U4.3 ; v1(-380.91,1197.83) -348.43,1230.31 C24.1 -309.06,1230.31 -281.5,1257.87 U4.12 ; v1(-264.76,38.39) v1(-149.61,38.39) ; v1(-166.34,-992.13) R16.1 ; Q7.2 -133.86,912.4 -115.16,893.7 -47.24,893.7 v1(-21.65,868.11) C28.1 C29.1 ; J2.3 -100,1752.56 C30.1 C31.1 ; J2.5 70.87,1729.13 C25.1 ; U4.55 29.53,1454.72 v1(31.5,1452.76) ; R21.1 148.55,1653.54 v1(171.27,1676.26) ; v1(144.69,773.62) Q9.2 ; v1(146.65,1325.79) 175.2,1297.24 U4.39 ; U4.32 145.86,1109.06 145.86,1154.34 131.89,1168.31 72.83,1168.31 49.21,1144.68 U4.27 49.21,1028.12 141.73,935.6 C23.1 149.61,918.31 Q8.2 ; U4.34 157.9,1198.82 145.71,1211 144.31,1211 v1(136.81,1218.5) U4.35 ; C22.1 C33.1@494.1,1354.33 ; C33.1 v1(549.21,1355.31) ; C21.1@496.06,1721.46 S1.1 ; S1.3 S1.1 ; v1(557.09,1811.02) 556.1,1810.04 S1.1 ; C6.1 v1(804.13,1766.73) ; Q2.2 990.16,1530.51 v1(991.14,1529.53) ; v1(1196.85,688.98) Q6.2 ; C8.1 1269.69,1406.5 1342.85,1406.5 IR4.0 ; Q4.2 1307.09,1119.01 v1(1307.09,1118.11) ; C11.1 1434.06,872.05 1484.84,821.26 IR7.0 ; v1(1435.04,-950.79) C12.1
  Top Layer w20: C15.1 v1(-397.64,765.75) -397.64,654.53 -359.25,616.14 C16.1 ; v1(-297.24,-1350.39) C18.1 -215.55,-1282.48 C17.1 -173.82,-1275 U3.4 ; v1(94.49,-1049.21) U3.8 C20.1@272.64,-1125 ; v1(254.92,-1538.39) D11.1
  Top Layer w40: v2(-688.98,-1104.33) -660.63,-1075.98 P5.2 -586.42,-950 v2(-526.57,-1009.84)
  Bottom Layer w10: v1(-149.61,38.39) C2.1 -145.67,-9.84 U1.15 ; C4.1 -85.63,129.92 -111.22,104.33 -111.22,57.09 -103.35,49.21 U1.18 ; U1.9 9.84,-108.27 28.54,-126.97 C3.1 ; U1.1 101.38,49.21 119.09,66.93 C1.1
  other v1: -657.48,-1634.84 120.08,957.26
IR_DIAGONAL_L: Q3.1 U4.4 | length 775.9
  Top Layer w10: Q3.1 -984.53,1415.35 U4.4
IR_DIAGONAL_R: Q4.1 U4.44 | length 1204.5
  Top Layer w10: U4.44 298.23,1395.67 365.16,1462.6 828.74,1462.6 1148.62,1142.72 1216.26,1142.72 Q4.1
IR_FRONT_L: Q1.1 U4.1 | length 529.8
  Top Layer w10: Q1.1 -539.37,1728.35 -539.37,1639.76 -476.38,1576.77 -359.25,1576.77 -256.89,1474.41 U4.1
IR_FRONT_R: Q2.1 U4.53 | length 1022.2
  Top Layer w10: U4.53 68.9,1477.36 v1(83.66,1462.6) ; v1(317.91,1462.6) 389.76,1534.45 929.13,1534.45 950.79,1556.1 Q2.1
  Bottom Layer w10: v1(83.66,1462.6) v1(317.91,1462.6)
IR_SIDE_1: Q5.1 U4.5 | length 1173.4
  Top Layer w10: Q5.1 -1235.24,1064.96 -904.53,1395.67 U4.5
IR_SIDE_2: Q6.1 U4.43 | length 1513.3
  Top Layer w10: U4.43 302.58,1375.98 332.56,1405.96 829.28,1405.96 1145.67,1089.57 1145.67,777.56 1194.88,728.35 Q6.1
IRR_DIAGONAL_L: C7.2 IR3.2 R5.2 U4.62 | length 1657.8
  Top Layer w10: IR3.2 -1358.8,1422.44 R5.2 C7.2 ; v1(-293.31,1641.73) -291.34,1643.7 -136.81,1643.7 -108.27,1615.16 U4.62
  Bottom Layer w10: IR3.2 -1295.12,1496.22 -1240.16,1551.18 -383.86,1551.18 v1(-293.31,1641.73)
IRR_DIAGONAL_R: C8.2 IR4.2 R6.2 U4.59 | length 1593.1
  Top Layer w10: v1(-56.1,1610.24) -49.21,1603.35 U4.59 ; v1(398.62,1494.09) 1182.09,1494.09 C8.2 R6.2 1321.22,1589.52 IR4.2
  Bottom Layer w10: v1(-56.1,1610.24) -56.1,1614.17 -32.48,1637.8 254.92,1637.8 v1(398.62,1494.09)
IRR_FRONT_L: C5.2 IR1.2 R3.2 U4.61 | length 1291.9
  Top Layer w10: IR1.2 -844.49,1933.07 R3.2 C5.2@-844.49,1765.75 ; C5.2 -845.47,1727.36 -835.63,1717.52 -751.97,1717.52 -568.9,1900.59 -371.06,1900.59 -351.38,1880.91 -351.38,1807.09 -217.52,1673.23 -134.84,1673.23 -88.58,1626.97 U4.61
IRR_FRONT_R: C6.2 IR2.2 R4.2 U4.60 | length 1131.7
  Top Layer w10: U4.60 -68.9,1497.05 v1(-52.17,1480.31) ; v1(254.92,1536.42) 335.63,1617.13 553.15,1617.13 702.76,1766.73 C6.2 R4.2 696.26,1831.3 IR2.2
  Bottom Layer w10: v1(-52.17,1480.31) -26.57,1480.31 29.53,1536.42 v1(254.92,1536.42)
IRR_LEFT_B: C10.2 IR6.2 R8.2 U4.64 | length 4034.6
  Top Layer w10: IR6.2 C10.2@-1429.72,-978.74 ; C10.2 -1404.53,-1003.94 -888.78,-1003.94 -737.2,-1155.51 -570.87,-1155.51 v1(-213.58,-798.23) ; v1(-213.58,1546.26) U4.64
  Bottom Layer w10: v1(-213.58,-798.23) v1(-213.58,1546.26)
IRR_LEFT_F: C9.2 IR5.2 R7.2 U4.63 | length 1907.7
  Top Layer w10: IR5.2 -1504.53,821.26 R7.2 C9.2 -1427.17,833.66 -1358.27,902.56 -1287.4,902.56 -1256.89,933.07 -1256.89,1001.97 -896.65,1362.2 v1(-877.95,1362.2) ; v1(-142.72,1607.28) -127.95,1592.52 U4.63
  Bottom Layer w10: v1(-877.95,1362.2) -832.68,1407.48 -420.28,1407.48 -220.47,1607.28 v1(-142.72,1607.28)
IRR_RIGHT_B: C12.2 IR8.2 R10.2 U4.57 | length 3645.7
  Top Layer w10: U4.57 -9.84,1437.01 89.57,1337.6 89.57,1205.71 106.3,1188.98 135.83,1188.98 185.78,1139.03 185.78,1094.73 335.63,944.88 335.63,662.4 380.91,617.13 v1(522.64,617.13) ; v1(1426.18,-761.81) 1435.04,-770.67 C12.2 R10.2 1597.05,-841.53 IR8.2
  Bottom Layer w10: v1(522.64,617.13) 694.88,617.13 786.42,525.59 786.42,-578.74 909.45,-701.77 1366.14,-701.77 v1(1426.18,-761.81)
IRR_RIGHT_F: C11.2 IR7.2 R9.2 U4.58 | length 1994.5
  Top Layer w10: U4.58 -29.53,1599.41 v1(-19.68,1609.25) ; v1(384.84,1437.99) 828.74,1437.99 1218.5,1048.23 1349.41,1048.23 C11.2 R9.2 1602.17,963.58 IR7.2
  Bottom Layer w10: v1(-19.68,1609.25) 242.13,1609.25 384.84,1466.54 v1(384.84,1437.99)
LED_B: Q9.1 U4.29 | length 466.1
  Top Layer w10: U4.29 88.58,1037.4 106.3,1019.68 174.45,1019.68 273.06,921.08 273.06,821.29 234.25,782.48 Q9.1
LED_G: Q8.1 U4.28 | length 295.4
  Top Layer w10: U4.28 68.9,1032.48 98.69,1002.68 162.67,1002.68 235.24,930.12 Q8.1
LED_R: Q7.1 U4.24 | length 213.2
  Top Layer w10: Q7.1 -94.49,950.79 -9.84,1035.43 U4.24
LEFTMOTOR_ENCODERA: P2.4 U4.6 | length 4183.3
  Top Layer w10: v1(-577.5,527.56) -374.02,324.07 -107.54,324.07 -32.48,249.02 -32.48,-569.88 v1(-42.32,-579.72) ; v1(-527.87,1330.4) -482.28,1375.98 U4.6
  Bottom Layer w10: P2.4 -566.24,-1841.25 -566.24,-1205.02 -42.32,-681.1 v1(-42.32,-579.72) ; v1(-577.5,527.56) -577.5,1003.49 -593.4,1019.38 -593.4,1264.87 v1(-527.87,1330.4)
LEFTMOTOR_ENCODERB: P2.5 U4.7 | length 4283.5
  Top Layer w10: v1(-537.83,527.56) -374.02,363.74 -91.1,363.74 -2.65,275.29 v1(-2.65,-579.72) ; v1(-505.95,1296.22) -445.87,1356.3 U4.7
  Bottom Layer w10: v1(-537.83,527.56) -537.83,1264.33 v1(-505.95,1296.22) ; P2.5@-500,-2000 -442.91,-1942.91 -442.91,-1843.5 -526.57,-1759.84 -526.57,-1221.46 -2.65,-697.53 v1(-2.65,-579.72)
MODE: S2.2 U4.18 | length 1151.6
  Top Layer w10: U4.18 -127.95,1162.4 -92.52,1197.83 v1(-41.34,1197.83) ; v1(271.65,1057.09) 590.55,738.19 647.64,738.19 691.93,782.48 S2.2
  Bottom Layer w10: v1(-41.34,1197.83) 95.47,1197.83 132.87,1160.43 168.31,1160.43 v1(271.65,1057.09)
MOTORCONTROL_LEFT1: U2.21 U4.20 | length 482.3
  Top Layer w10: U2.21 -481.11,1093.69 -272.83,1093.69 -214.57,1035.43 -104.33,1035.43 -88.58,1051.18 U4.20
MOTORCONTROL_LEFT2: U2.22 U4.19 | length 450.5
  Top Layer w10: U2.22 -270.67,1117.13 -208.66,1055.12 -112.2,1055.12 -108.27,1059.05 U4.19
MOTORCONTROL_LEFTPWM: U2.23 U4.31 | length 1851.5
  Top Layer w10: U2.23 -418.31,1142.72 v1(-407.48,1153.54) ; v1(-382.87,873.03) -247.05,873.03 -220.47,846.46 -220.47,707.26 -106.45,593.24 240.31,593.24 308.07,661 308.07,940.94 193.9,1055.12 136.81,1055.12 127.95,1063.98 U4.31
  Bottom Layer w10: v1(-407.48,1153.54) -419.29,1141.73 -419.29,909.45 v1(-382.87,873.03)
MOTORCONTROL_RIGHT1: U2.17 U4.22 | length 552.4
  Top Layer w10: U2.17 -416.34,989.17 -377.24,950.07 -193.07,950.07 -167.47,975.66 -117.7,975.66 -49.21,1044.15 U4.22
MOTORCONTROL_RIGHT2: U2.16 U4.23 | length 578.1
  Top Layer w10: U2.16 -415.36,963.58 -384.84,933.07 -186.02,933.07 -160.43,958.66 -110.66,958.66 -29.53,1039.79 U4.23
MOTORCONTROL_RIGHTPWM: U2.15 U4.30 | length 1590.6
  Top Layer w10: U2.15 -424.21,937.99 -402.29,916.07 -228.08,916.07 -193.9,881.89 -193.9,704.72 -99.41,610.24 233.27,610.24 290.06,667.03 290.06,931.4 183.34,1038.12 117.39,1038.12 108.27,1047.24 U4.30
MOTORCONTROL_STBY: U2.19 U4.21 | length 493.2
  Top Layer w7: U2.19 -482.61,1039.7 -240.75,1039.7 -220.99,1019.93 -97.91,1019.93 -72.18,1045.67 -72.18,1104.01 U4.21
MPU9150_INT: U1.12 U4.46 | length 2203.5
  Top Layer w10: v1(147.64,1405.51) 147.64,1420.28 162.4,1435.04 U4.46
  Bottom Layer w10: U1.12 -100.39,-130.91 -169.29,-130.91 -192.91,-107.28 -192.91,158.46 -69.61,281.76 134.13,281.76 308.79,456.43 308.79,1089.83 112.2,1286.42 112.2,1370.08 v1(147.64,1405.51)
MPU9150_SCL: R1.1 U1.23 U4.47 | length 1699.9
  Top Layer w10: U4.47 266.73,1454.73 294.31,1427.15 v1(294.31,1427.23)
  Bottom Layer w10: U1.23 29.53,159.45 R1.1 18.7,167.32 -16.73,202.76 -16.73,247.05 0.98,264.76 155.09,264.76 325.79,435.46 325.79,1395.75 v1(294.31,1427.23)
MPU9150_SDA: R2.1 U1.24 U4.48 | length 1776.9
  Top Layer w10: U4.48 256.83,1474.41 v1(299.23,1516.81)
  Bottom Layer w10: U1.24 49.21,85.63 81.69,118.11 R2.1 252.95,167.32 344.49,258.86 344.49,1473.43 301.11,1516.81 v1(299.23,1516.81)
NetC3_2: C3.2 U1.10 | length 76.8
  Bottom Layer w10: C3.2 -26.57,-130.91 -9.84,-114.17 U1.10
NetC4_2: C4.2 U1.20 | length 69.9
  Bottom Layer w10: U1.20 C4.2@-29.53,149.61
NetC17_2: C17.2 C18.2 Q10.1 Q10.3 U3.2 | length 1604.4
  Top Layer w20: C18.2 -217.52,-1176.18 C17.2 -163.19,-1175 U3.2 -41.54,-1175 14.76,-1231.3 14.76,-1384.84 61.58,-1431.66 594.06,-1431.66 663.39,-1500.98 663.39,-1552.17 702.36,-1591.14 Q10.3 817.52,-1591.14 834.65,-1608.27 834.65,-1655.51 799.01,-1691.14 Q10.1
NetC19_1: C19.1 R16.2 | length 50.2
  Top Layer w10: C19.1 R16.2@-64.96,-993.11
NetC19_2: C19.2 U3.1 | length 92.3
  Top Layer w10: C19.2 -120.08,-1099.41 U3.1
NetC28_2: C28.2 C29.2 C30.2 C31.2 U4.25 U4.56 | length 1081.5
  Top Layer w10: v1(-106.3,1700.79) -60.04,1654.53 C30.2 C31.2 9.84,1641.73 U4.56 ; v1(-87.6,1440.94) 9.84,1343.5 U4.25 9.84,1018.7 31.5,997.05 C29.2 C28.2
  Bottom Layer w10: v1(-106.3,1700.79) -106.3,1621.06 -87.6,1602.36 v1(-87.6,1440.94)
NetC32_2: C32.2 R23.1 Y1.1 | length 192.5
  Top Layer w10: R23.1@389.76,1300.2 C32.2 440.95,1249.73 486.94,1203.74 Y1.1
NetC33_2: C33.2 U4.40 Y1.2 | length 847.1
  Top Layer w10: U4.40 286.42,1316.93 300.2,1303.15 300.2,1277.56 ; Y1.2 351.38,1226.38 300.2,1277.56 ; C33.2 535.43,1300.2 569.88,1265.75 569.88,1139.76 552.17,1122.05 312.99,1122.05 300.2,1134.84 300.2,1277.56
NetC36_2: C36.2 F1.1 VR1.2 VR1.4 | length 466.2
  Top Layer w10: F1.1 -751.13,-1210.63 VR1.4 VR1.2 C36.2@-703.17,-1581.28
NetD1_2: D1.2 Q1.3 | length 148.8
  Top Layer w10: D1.2 -676.18,1698.82 Q1.3
NetD2_2: D2.2 Q2.3 | length 145.1
  Top Layer w10: D2.2 Q2.3@970.08,1650
NetD3_2: D3.2 Q3.3 | length 155
  Top Layer w10: D3.2 -1124.57,1385.36 Q3.3
NetD4_2: D4.2 Q4.3 | length 146.7
  Top Layer w10: D4.2 1311.06,1213.94 Q4.3
NetD5_1: D5.1 D7.2 | length 4293.4
  Top Layer w10: D5.1 -1062.6,850 -813.63,601.03 -813.63,-591.88 -789.5,-616.01 536.15,-616.01 537,-615.16 629.92,-615.16 v1(655.51,-640.75) ; v1(795.28,-688.98) 1297.24,-688.98 1392.72,-784.45 1392.72,-891.73 1334.45,-950 D7.2
  Bottom Layer w10: v1(655.51,-640.75) 747.05,-640.75 v1(795.28,-688.98)
NetD5_2: D5.2 Q5.3 | length 132.5
  Top Layer w10: D5.2 Q5.3@-1325,1082.48
NetD6_1: D6.1 D8.2 | length 4317.5
  Top Layer w10: D8.2 -951.38,-850 -812.01,-710.63 670.28,-710.63 851.38,-529.53 851.38,598.43 903.54,650.59 1370.08,650.59 1396.65,677.17 1396.65,878.35 D6.1
NetD6_2: D6.2 Q6.3 | length 140.2
  Top Layer w10: Q6.3 D6.2@1323.82,848.82
NetD10_2: D10.2 R11.2 | length 87.6
  Top Layer w10: R11.2 -61.28,732.28 D10.2
NetD10_3: D10.3 R12.2 | length 63.4
  Top Layer w10: D10.3 R12.2
NetD10_4: D10.4 R13.2 | length 72.4
  Top Layer w10: R13.2 D10.4
NetD11_2: D11.2 Q10.8 | length 196.1
  Top Layer w20: D11.2 518.9,-1715.55 Q10.8
NetD12_1: D12.1 R17.2 | length 54.1
  Top Layer w10: D12.1 R17.2
NetD12_2: D12.2 R14.1 U3.5 | length 1517.2
  Top Layer w10: v1(144.68,-1399.61) 94.49,-1349.41 U3.5 176.57,-1275 D12.2 ; v1(251.97,-1742.13) 290.99,-1781.15 827.12,-1781.15 924.21,-1684.06 R14.1
  Bottom Layer w10: v1(144.68,-1399.61) 230.42,-1485.34 230.42,-1549.41 231.3,-1550.29 231.3,-1623.03 251.97,-1643.7 v1(251.97,-1742.13)
NetD14_1: D14.1 R24.1 | length 54.1
  Top Layer w10: R24.1 D14.1@-860.24,-1626.97
NetL1_1: L1.1 Q10.7 | length 585.4
  Top Layer w20: v1(435.04,-1362.2) L1.1 ; v1(455.71,-1667.32) 481.89,-1641.14 Q10.7
  Bottom Layer w20: v1(435.04,-1362.2) 435.04,-1646.65 v1(455.71,-1667.32)
NetL1_2: L1.2 R15.2 U3.7 | length 1086.5
  Top Layer w20: U3.7 51.97,-1175 24.61,-1147.64 24.61,-1040.35 54.13,-1010.83 434.06,-1010.83 L1.2 383.86,-1185.04 R15.2
NetP2_1: P2.1 U2.1 U2.2 | length 3404.6
  Top Layer w20: U2.1 U2.2 -863.19,1142.72 -871.49,1134.42 -871.49,776.72 -735.24,640.46 v2(-735.24,635.83)
  Bottom Layer w20: v2(-735.24,635.83) -735.24,-718.48 -618.11,-835.6 -618.11,-1808.07 -649.61,-1839.57 -649.61,-1949.61 -675,-1975 P2.1
NetP2_2: P2.2 U2.5 U2.6 | length 3087.6
  Top Layer w20: v2(-780.98,770.2) -780.98,826.25 -844.49,889.76 -844.49,1018.7 -821.43,1041.76 -758.86,1041.76 U2.5
  Bottom Layer w20: v2(-780.98,770.2) -780.98,-1819.02 -725,-1875 P2.2
NetP3_1: P3.1 U2.11 U2.12 | length 3831.7
  Top Layer w20: U2.11 U2.12 -357.28,485.24 339.57,485.24 339.57,484.25 381.89,441.93 v2(381.89,-529.53)
  Bottom Layer w20: v2(381.89,-529.53) 384.84,-532.48 384.84,-1884.84 475,-1975 P3.1
NetP3_2: P3.2 U2.7 U2.8 | length 3972.9
  Top Layer w20: U2.7 U2.8 -672.04,989.17 -614.17,931.3 -614.17,780.31 -382.09,548.23 470.47,548.23 513.78,504.92 v2(513.78,-532.48)
  Bottom Layer w20: P3.2 513.78,-1861.22 v2(513.78,-532.48)
NetP4_2: P4.2 P5.1 | length 1844.3
  Top Layer w40: P5.1 -739.37,-789.57 -695.87,-746.06 710.63,-746.06 739.37,-774.8 P4.2
NetQ7_3: Q7.3 R11.1 | length 89.1
  Top Layer w10: R11.1 -114.17,821.85 Q7.3
NetQ8_3: Q8.3 R12.1 | length 83.7
  Top Layer w10: R12.1 Q8.3
NetQ9_3: Q9.3 R13.1 | length 101.8
  Top Layer w10: R13.1 168.31,660.43 Q9.3
NetQ10_2: Q10.2 U3.3 | length 1136.3
  Top Layer w20: U3.3 -53.54,-1225 -26.97,-1251.58 -26.97,-1401.18 30.51,-1458.66 564.96,-1458.66 619.09,-1512.8 619.09,-1573.82 686.42,-1641.14 Q10.2
NetQ10_4: Q10.4 R14.2 | length 122.8
  Top Layer w20: Q10.4@746.26,-1541.34 R14.2
NetR23_2: R23.2 U4.41 | length 128
  Top Layer w10: U4.41 299.21,1336.61 332.68,1303.15 R23.2
RESET: C21.2 J2.10 R22.1 S1.2 S1.4 U4.38 | length 1462
  Top Layer w10: J2.10 J2.10@208.07,1900 ; U4.38 131.89,1277.56 114.17,1295.28 114.17,1437.99 336.61,1660.43 336.61,1813.98 250.59,1900 J2.10@208.07,1900 ; R22.1@433.07,1665.35 S1.2 S1.4 283.46,1975.39 J2.10@208.07,1900
RIGHTMOTOR_ENCODERA: P3.4 U4.8 | length 4836.3
  Top Layer w10: v1(-494.68,527.56) -374.02,406.89 -73.23,406.89 40.5,293.16 v1(40.5,-579.72) ; v1(-483.54,1257.61) -404.53,1336.61 U4.8
  Bottom Layer w10: v1(-494.68,527.56) -494.68,1246.46 v1(-483.54,1257.61) ; v1(40.5,-579.72) 303.55,-842.77 303.55,-2005.32 340.55,-2042.32 725.39,-2042.32 774.61,-1993.11 774.61,-1958.66 743.11,-1927.17 627.16,-1927.17 600,-1900 P3.4
RIGHTMOTOR_ENCODERB: P3.5 U4.9 | length 4390.4
  Top Layer w10: v1(-458.66,1227.36) -369.09,1316.93 U4.9 ; v1(-455.71,527.56) -374.02,445.87 -57.09,445.87 79.47,309.31 v1(79.47,-579.72)
  Bottom Layer w10: v1(-458.66,1227.36) -458.66,530.51 v1(-455.71,527.56) ; v1(79.47,-579.72) 342.52,-842.77 342.52,-1984.25 383.59,-2025.32 674.68,-2025.32 P3.5@700,-2000
TCLK: J2.7 R21.2 U4.52 | length 284.1
  Top Layer w10: U4.52 88.58,1598.43 101.19,1611.03 101.19,1678.95 R21.2 130.91,1769.09 J2.7
TDI: J2.9 R20.1 U4.50 | length 345.8
  Top Layer w10: U4.50 127.95,1586.62 138.78,1597.44 163.39,1597.44 212.87,1646.92 212.87,1700.07 222.44,1709.65 R20.1 243.11,1756.89 J2.9
TDO: J2.8 R19.1 U4.49 | length 706.6
  Top Layer w10: R19.1 100.39,1900.39 J2.8 100,1884.25 131.5,1884.25 163.39,1852.36 269.69,1852.36 316.93,1805.12 316.93,1664.79 198.4,1546.26 U4.49
TMS: J2.6 R18.1 U4.51 | length 614.6
  Top Layer w10: R18.1 0,1978.35 J2.6 51.57,1848.43 130.91,1848.43 153.54,1825.79 153.54,1770.67 195.87,1728.35 195.87,1653.96 158.05,1616.14 133.44,1616.14 108.27,1590.97 U4.51
VBAT: C15.2 C16.2 C20.2 C34.2 C35.2 D1.1 D2.1 D3.1 D4.1 D7.1 D8.1 D10.1 P4.1 R15.1 R17.1 U2.13 U2.14 U2.24 U3.6 VR1.3 | length 17206
  Top Layer w10: C35.2 C35.2@-611.07,-1581.69 ; VR1.3 -612.62,-1580.14 C35.2@-611.07,-1581.69 ; -527.56,-1719.49 -502.95,-1694.88 -502.95,-1589.57 -510.83,-1581.69 C34.2 C35.2@-611.07,-1581.69 ; C16.2 -265.75,669.29 -236.22,669.29 v1(-170.28,603.35) ; D10.1 -27.16,787.99 -6.89,767.72 -6.89,685.04 v1(-39.37,652.56) ; R17.1 252.95,-1250.98 C20.2 275.59,-1219.49 369.09,-1125.98 R15.1
  Top Layer w20: D8.1 -1540.75,-734.25 ; v1(-1170.77,-1583.17) -1749.02,-1004.92 -1749.02,-807.09 -1676.18,-734.25 -1540.75,-734.25 ; v1(-872.05,-1719.49) -527.56,-1719.49 62.99,-1719.49 146.65,-1803.15 979.33,-1803.15 1514.76,-1267.72 1242.13,-995.08 1242.13,-925.2 D7.1@1317.32,-850 ; D1.1 -970.08,1650 -1210.35,1409.72 D3.1 -1301.57,1223.43 -1533.46,1223.43 -1748.03,1008.86 -1748.03,812.99 -1675.2,740.16 -997.05,740.16 -835.63,578.74 -835.63,-568.9 -930.12,-663.39 -1469.88,-663.39 -1540.75,-734.25 ; v1(-646.65,1247.05) -567.91,1168.31 -544.29,1168.31 ; U2.24 -544.29,1168.31 ; C16.2 -318.9,780.51 -359.25,820.87 -447.83,820.87 C15.2 -501.97,850.39 -483.27,869.09 U2.13 U2.14 -557.09,912.4 -618.11,973.43 -618.11,1094.49 -544.29,1168.31 ; C20.2@272.25,-1225 U3.6 55.71,-1225 -16.73,-1152.56 -16.73,-1010.83 18.7,-975.39 635.24,-975.39 P4.1 660.63,-1079.92 679.13,-1098.43 971.46,-1098.43 1219.88,-850 D7.1@1317.32,-850 ; D7.1 D7.1@1317.32,-850
  Bottom Layer w10: v1(-170.28,603.35) -121.06,652.56 v1(-39.37,652.56)
  Bottom Layer w20: D3.1 -1140.79,1245.08 -648.62,1245.08 v1(-646.65,1247.05) ; v1(-1170.77,-1583.17) -1034.45,-1719.49 v1(-872.05,-1719.49) ; D1.1 -759.65,1584.65 -587.6,1584.65 -506.89,1665.35 -506.89,1997.05 -472.44,2031.5 556.1,2031.5 628.94,1958.66 628.94,1690.94 669.88,1650 D2.1 793.5,1718.5 1083.66,1718.5 1139.65,1662.52 D4.1
VIN: J1.3 Q10.5 Q10.6 | length 440.4
  Top Layer w20: J1.3 205.75,-1678.11 259.84,-1624.02 446.85,-1624.02 479.72,-1591.14 Q10.6 Q10.5
pads on no net: J2.4 P4.N P5.N U1.2 U1.4 U1.5 U1.6 U1.7 U1.14 U1.16 U1.19 U1.21 U1.22 U1.25 U4.10 U4.17 U4.33 U4.36 U4.45

## Polygon pours and split planes (outlines as drawn)
GND on Bottom Layer "GND" (solid, remove dead copper, pour order 4): -1079.28,-2031.91 cw(c-125,-625.01) -1799.55,-918.12 -1799.55,-918.11 cw(c-1553.29,-875.01) -1553.29,-625.01 -975,-625.01 ccw(c-975,-525.01) -875,-525.01 -875,524.99 ccw(c-975,524.99) -975,624.99 -1553.29,624.99 cw(c-1553.29,874.99) -1799.55,918.09 cw(c-125,624.99) -1079.28,2031.89 cw(c-938.95,1824.99) -938.95,2074.99 938.94,2074.99 cw(c938.94,1824.99) 1079.27,2031.89 cw(c125,624.99) 1799.54,918.09 cw(c1553.28,874.99) 1553.28,624.99 975,624.99 ccw(c975,524.99) 875,524.99 875,-525.01 ccw(c975,-525.01) 975,-625.01 1553.28,-625.01 cw(c1553.28,-875.01) 1799.54,-918.11 1799.54,-918.12 cw(c125,-625.01) 1079.27,-2031.91 cw(c938.94,-1825.01) 938.94,-2075.01 -938.95,-2075.01 cw(c-938.95,-1825.01)

## Silkscreen, mask and mechanical layers (free items; w line width, h text height)
Top Overlay:
  text "Designed By:" at 964.57,-1216.54 h40
  text "Anthony Merlino" at 957.68,-1287.4 h40
  text "c 2014" at 969.49,-1373.03 h40
  text "o" at 952.76,-1391.73 h100
Mechanical 2:
  the board outline again, w5
Mechanical 10:
  lines w5: -2053.29,-0.01 2053.28,-0.01 ; 0,-2325 0,2325

## Text inside footprints (layer, text, board x,y; h text height)
J2: Top Overlay "2" at -300,1880 h39.37; Top Overlay "1" at -280,1780 h39.37; Top Overlay "9" at 260,1780 h39.37; Top Overlay "10" at 260,1880 h39.37
P2: Top Overlay "6" at -440,-1895 h39.37; Top Overlay "5" at -440,-1995 h39.37; Top Overlay "2" at -800,-1895 h39.37; Top Overlay "1" at -780,-1995 h39.37
P3: Top Overlay "6" at 760,-1895 h39.37; Top Overlay "5" at 760,-1995 h39.37; Top Overlay "2" at 400,-1895 h39.37; Top Overlay "1" at 420,-1995 h39.37